# Allegro board PCADE.brd
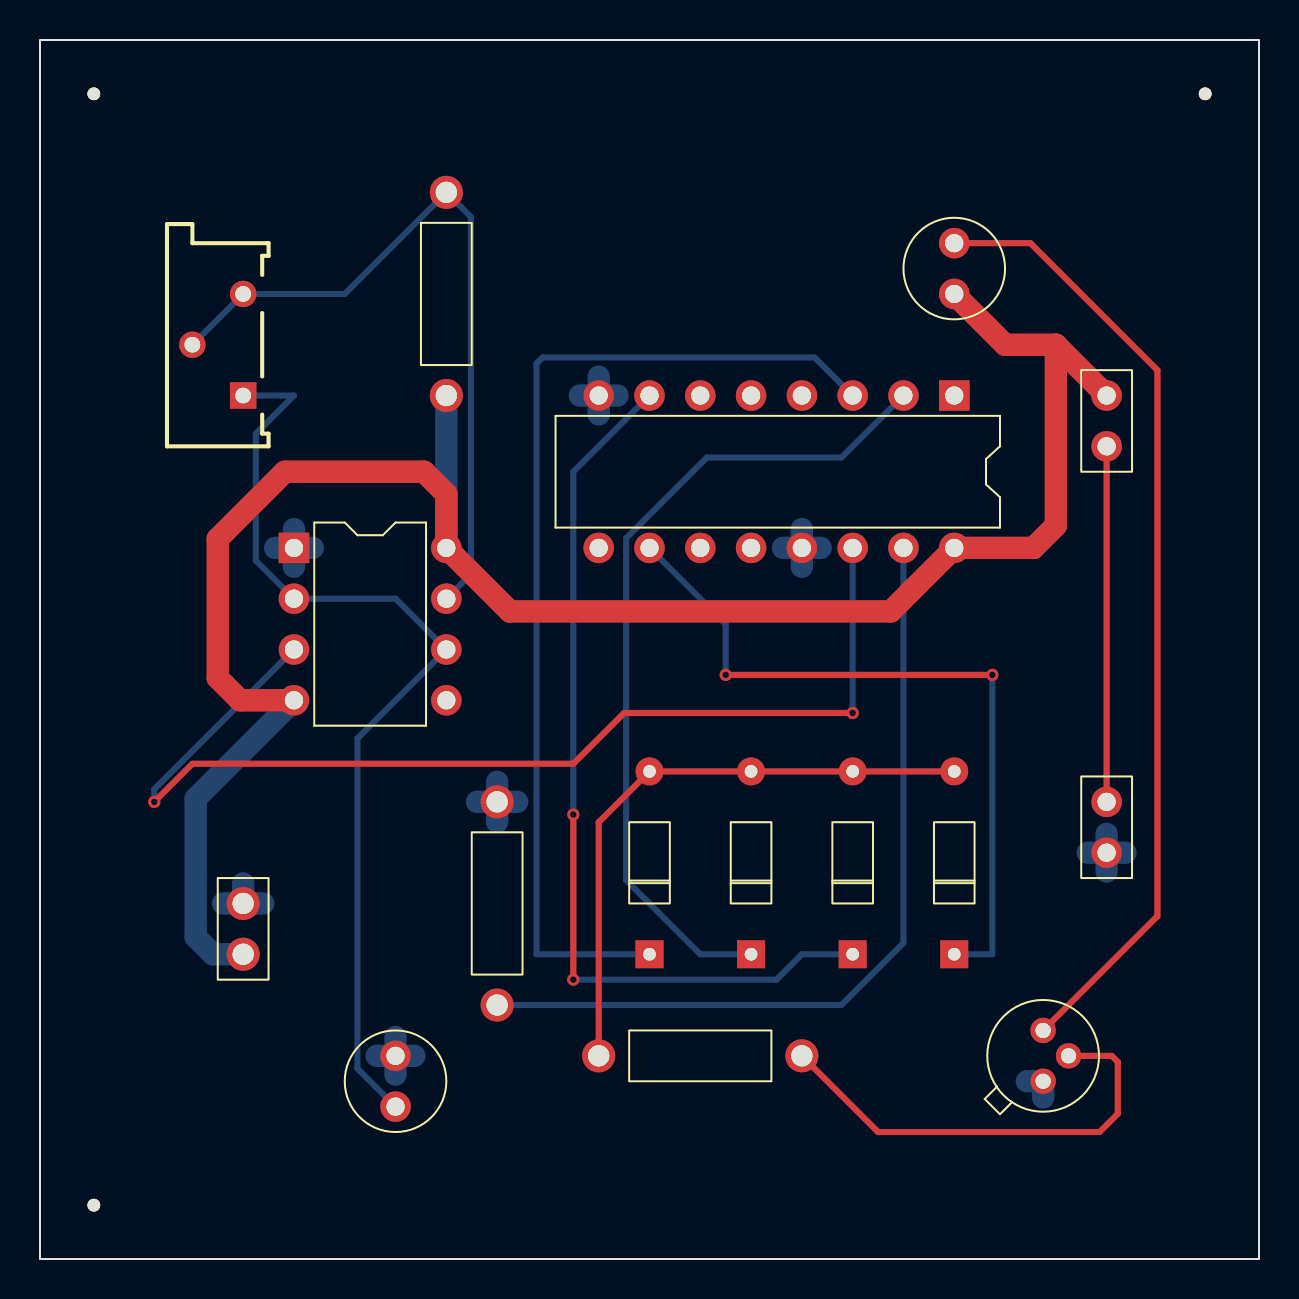
[diagram p0: board, top side]
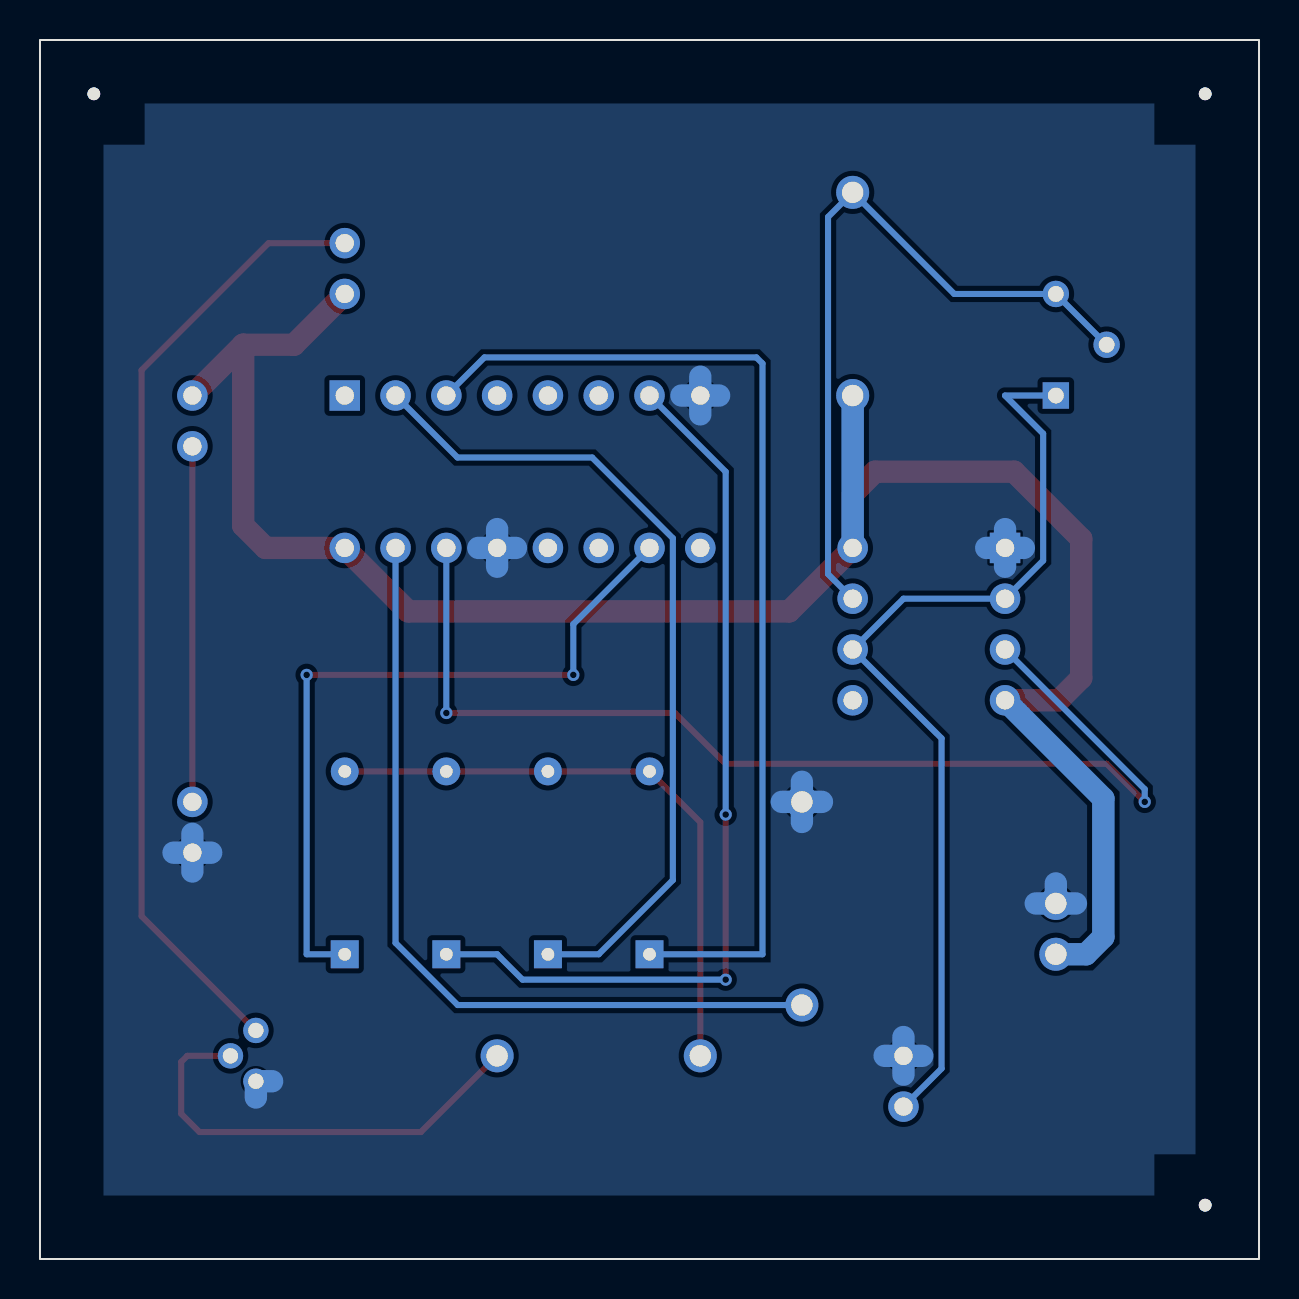
[diagram p1: board, bottom side, seen from below]

Outline 60.96 x 60.96 mm; copper layers: TOP, BOTTOM. Coordinates in mm from the lower left corner of the outline.
Outline path: rectangle 0,0 60.96,60.96

## Design rules (mm)
nets with their own width: min track width 0.305; nets N04224 N04316 N04372 N04376 N04392 N04422 N04430 N04434 N04438 N04442 N04610 N04696
nets with their own width: min track width 1.118; nets 9V GND

## Placement (name value [footprint] x y rotation side)
BT1  9V  [JUMPER2]  53.34 22.86 270 top
C1  100nF  [CAPCK05]  10.16 15.24 0 top
C2  1uF  [CAP196]  17.78 7.62 0 top
D1  DIODE  [DO35]  30.48 15.24 0 top
D2  DIODE  [DO35]  35.56 15.24 0 top
D3  DIODE  [DO35]  40.64 15.24 0 top
D4  DIODE  [DO35]  45.72 15.24 0 top
DS1  6V 60mA  [CAP196]  45.72 48.26 0 top
NOREF  -  [unnamed]  2.69 2.69 0 top
NOREF#2  -  [unnamed]  58.27 58.27 0 top
NOREF#3  -  [#2]  0 0 0 top
NOREF#4  -  [unnamed]  2.69 58.27 0 top
NOREF#5  -  [#2]  60.96 0 90 top
Q1  BC108  [TO18]  50.16 8.89 0 top
R1  100k  [RES400]  20.32 43.18 0 top
R2  22k  [RES400]  22.86 12.7 0 top
R3  2k2  [RES400]  27.94 10.16 270 top
R4  1M  [VRES20]  10.16 43.18 90 top
SW1  SW KEY-SPST  [JUMPER2]  53.34 43.18 270 top
U1  4017  [DIP16_3]  45.72 43.18 270 top
U2  NE555  [DIP8_3]  12.7 35.56 0 top

## Library data of the parts
BT1 = BATTERY: User Part Number: ***
C1 = CAP NP: Tolerance: ***; User Part Number: ***
C2 = CAP POL: Tolerance: ***; User Part Number: ***
D1-D4 = DIODE
DS1 = LAMP: Tolerance: ***; User Part Number: ***
Q1 = BC108
R1-R3 = R: Tolerance: ***; User Part Number: ***
R4 = POT
SW1 = SW KEY-SPST: User Part Number: ***
U1 = 4017_3: Tolerance: ***; User Part Number: ***
U2 = NE555_1: Tolerance: ***; User Part Number: ***

## Footprints (pads in the part's own frame, mm; a bottom-side part is the same pattern mirrored in y, then rotated)
CAP196
  round 1.524 hole 0.914: 1(0,0) 2(0,2.54)
CAPCK05
  round 1.651 hole 1.067: 1(0,0) 2(0,2.54)
DIP8_3
  rect 1.524x1.524 hole 0.914: 1(0,0)
  round 1.524 hole 0.914: 2(0,-2.54) 3(0,-5.08) 4(0,-7.62) 5(7.62,-7.62) 6(7.62,-5.08) 7(7.62,-2.54) 8(7.62,0)
DIP16_3
  rect 1.524x1.524 hole 0.914: 1(0,0)
  round 1.524 hole 0.914: 2(0,-2.54) 3(0,-5.08) 4(0,-7.62) 5(0,-10.16) 6(0,-12.7) 7(0,-15.24) 8(0,-17.78) 9(7.62,-17.78) 10(7.62,-15.24) 11(7.62,-12.7) 12(7.62,-10.16) 13(7.62,-7.62) 14(7.62,-5.08) 15(7.62,-2.54) 16(7.62,0)
DO35
  rect 1.397x1.397 hole 0.635: 1(0,0)
  round 1.397 hole 0.635: 2(0,9.144)
JUMPER2
  round 1.524 hole 0.914: 1(0,0) 2(2.54,0)
RES400
  round 1.651 hole 1.067: 1(0,0) 2(0,10.16)
TO18
  round 1.27 hole 0.762: 1(0,0) 2(1.27,1.27) 3(0,2.54)
unnamed
  round 0.635 hole 3.175 unplated: (0,0)
VRES20
  rect 1.321x1.321 hole 0.787: 1(0,0)
  round 1.321 hole 0.787: 2(2.54,2.54) 3(5.08,0)

## Nets
9V: C1.1 DS1.1 R1.1 SW1.1 U1.16(VCC) U2.4 U2.8(VCC)
GND: BT1.2(-) C1.2 C2.2 Q1.1(EMITTER) R2.2 U1.8 U1.13 U2.1
N04224: U1.14 U2.3
N04316: R1.2 R4.2(WIPER) R4.3 U2.7
N04372: R2.1 U1.15
N04376: BT1.1 SW1.2
N04392: DS1.2 Q1.3
N04422: C2.1 R4.1 U2.2 U2.6
N04430: D1.1 U1.3
N04434: D2.1 U1.2
N04438: D3.1 U1.7
N04442: D4.1 U1.10
N04610: D1.2(K) D2.2(K) D3.2(K) D4.2(K) R3.1
N04696: Q1.2 R3.2

Pads without a net: U1 1 4 5 6 9 11 12; U2 5

## Via types
v1: diameter 0.61, hole 0.33, TOP to BOTTOM, 6 vias

## Routing (per net, layer and track width the routed paths; a pad name or vN(x,y) marks a point on that pad's centre or on a via; arc(x,y) is an arc through that point)
9V: length 103.8
  TOP w1.118: 50.8,45.72 SW1.1 ; 50.8,45.72 50.8,36.68 49.68,35.56 U1.16 42.55,32.39 23.49,32.39 U2.8 20.32,38.25 19.2,39.37 12.24,39.37 8.89,36.02 8.89,29.06 10.01,27.94 U2.4 ; 50.8,45.72 48.26,45.72 DS1.1
  BOTTOM w1.118: U2.4 7.78,23.02 7.78,16.1 8.65,15.24 C1.1 ; R1.1 U2.8
GND: length 27.5
  BOTTOM w1.118: 9.16,17.78 C1.2 ; C1.2 11.16,17.78 ; C1.2 10.16,18.78 ; 11.76,35.56 U2.1 ; U2.1 13.64,35.56 ; U2.1 12.7,34.62 ; U2.1 12.7,36.5 ; BT1.2 53.34,21.26 ; BT1.2 52.4,20.32 ; BT1.2 54.28,20.32 ; BT1.2 53.34,19.38 ; U1.13 38.1,36.5 ; U1.13 39.04,35.56 ; U1.13 37.16,35.56 ; U1.13 38.1,34.62 ; C2.2 18.72,10.16 ; C2.2 16.84,10.16 ; C2.2 17.78,9.22 ; C2.2 17.78,11.1 ; 27.94,42.24 U1.8 ; U1.8 27.94,44.12 ; U1.8 28.88,43.18 ; U1.8 27,43.18 ; R2.2 23.86,22.86 ; R2.2 22.86,23.86 ; R2.2 21.86,22.86 ; R2.2 22.86,21.86 ; 50.16,8.08 Q1.1 49.35,8.89
N04224: length 55.5
  TOP w0.305: v1(40.64,27.3) 29.21,27.3 26.67,24.77 7.62,24.77 v1(5.72,22.86)
  BOTTOM w0.305: v1(5.72,22.86) 5.72,23.49 U2.3 ; v1(40.64,27.3) U1.14
N04316: length 37.2
  BOTTOM w0.305: R4.2 R4.3 15.24,48.26 R1.2 21.55,52.11 21.55,34.25 U2.7
N04372: length 41.4
  BOTTOM w0.305: R2.1 40.07,12.7 43.18,15.81 U1.15
N04376: length 17.8
  TOP w0.305: SW1.2 BT1.1
N04392: length 48.2
  TOP w0.305: DS1.2 49.53,50.8 55.88,44.45 55.88,17.15 Q1.3
N04422: length 48.4
  BOTTOM w0.305: C2.1 15.87,9.53 15.87,26.03 U2.6 17.78,33.02 U2.2 10.79,34.93 10.79,41.27 12.7,43.18 R4.1
N04430: length 51.9
  BOTTOM w0.305: D1.1 24.83,15.24 24.83,44.78 25.13,45.09 38.73,45.09 U1.3
N04434: length 41.7
  BOTTOM w0.305: U1.2 40.08,40.08 33.35,40.08 29.31,36.04 29.31,18.95 33.02,15.24 D2.1
N04438: length 45.3
  TOP w0.305: v1(26.67,13.97) v1(26.67,22.23)
  BOTTOM w0.305: D3.1 38.1,15.24 36.83,13.97 v1(26.67,13.97) ; v1(26.67,22.23) 26.67,39.37 U1.7
N04442: length 37.1
  TOP w0.305: v1(47.62,29.21) v1(34.29,29.21)
  BOTTOM w0.305: D4.1 47.62,15.24 v1(47.62,29.21) ; v1(34.29,29.21) 34.29,31.75 U1.10
N04610: length 30.5
  TOP w0.305: R3.1 27.94,21.84 D1.2 D2.2 D3.2 D4.2
N04696: length 22.9
  TOP w0.305: R3.2 41.91,6.35 52.98,6.35 53.9,7.26 53.9,9.86 53.59,10.16 Q1.2

## Copper pours and planes (outline as drawn; the poured copper is in the pictures)
GND on BOTTOM: 3.18,57.79 3.18,3.18 57.79,3.18 57.79,57.79

## Text on the board
XSECTION_CHART: *  SURFACE | L1 TOP CONDUCTOR | *  DIELECTRIC | L2 BOTTOM CONDUCTOR | DESIGN CROSS SECTION CHART | ___________________________ | TOTAL THICKNESS 10.4 MIL | 1-2
DIMENSION: FIGURE | FINISHED_SIZE | 13.0 | 25.0 | 30.0 | 31.0 | 36.0 | 42.0 | 125.0 | DRILL CHART: TOP to BOTTOM | ALL UNITS ARE IN MILS | PLATED | NON-PLATED | QTY | 6 | 8 | 3 | 32
